# Altium PCB ZS-005.PcbDoc
Units mil, origin at the board's own origin, x right, y up, seen from the top; angles counter-clockwise.
Board outline 2371.88 x 911.23 mil, 2 copper layers (Top Layer, Bottom Layer); 11 components, 8 nets, 38 pads, 28 vias.
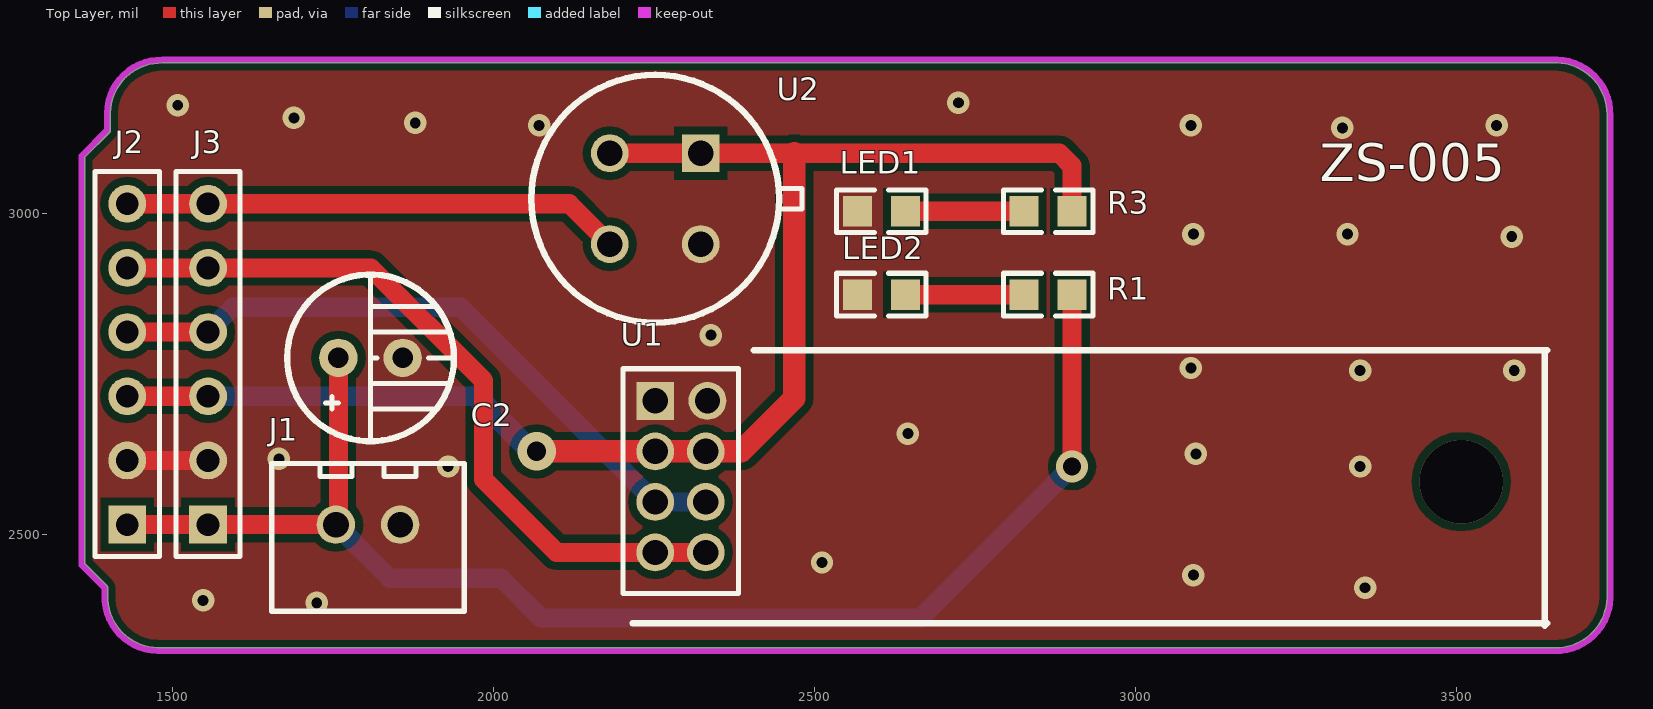
[diagram p0: Top Layer view]
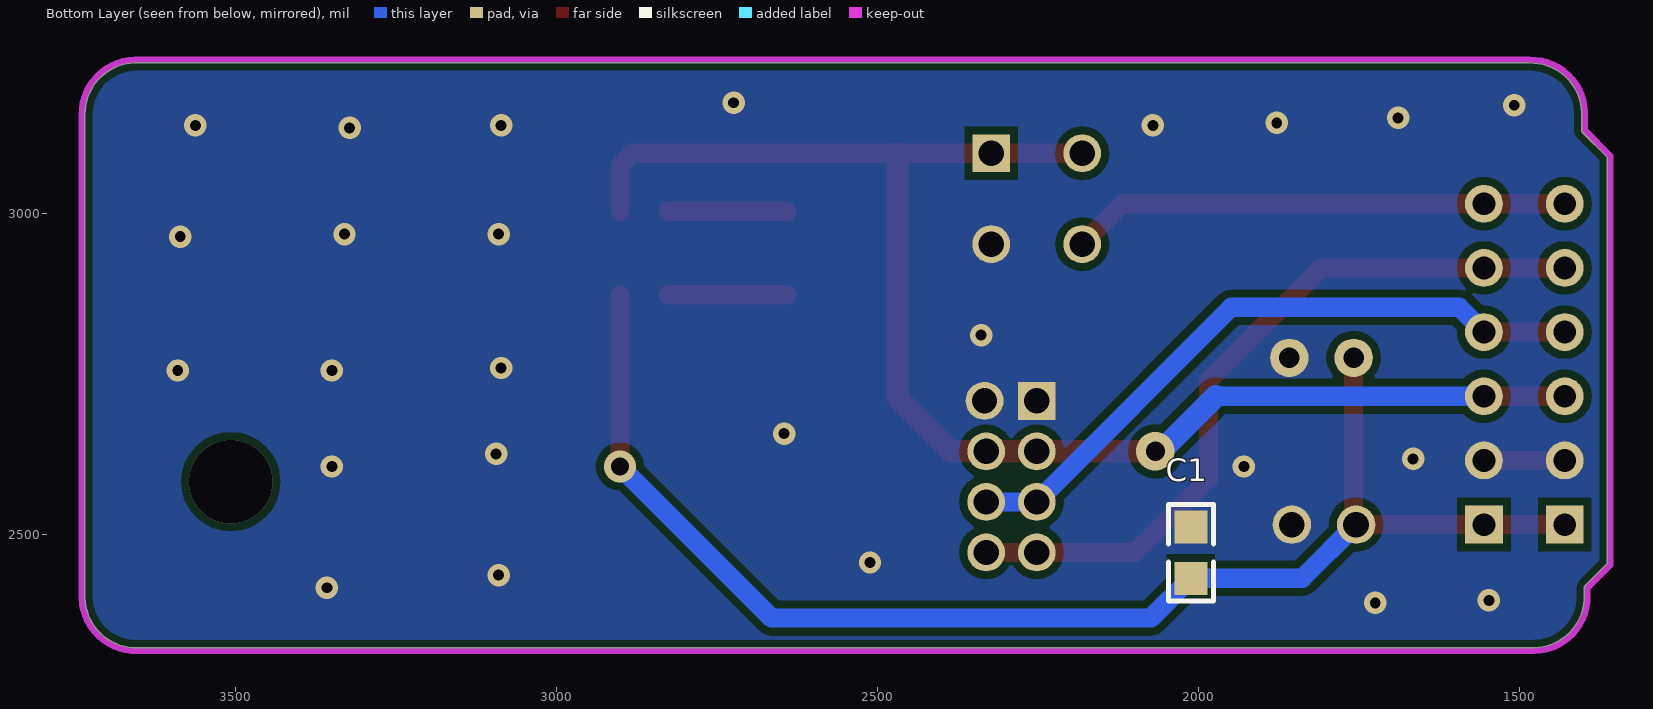
[diagram p1: Bottom Layer view, seen from below]

## Layer stack, top to bottom
Top Solder: solder mask 0.4, Solder Resist, Dk 3.5
Top Layer: signal copper 1.4
Dielectric 1: dielectric 12.6, FR-4, Dk 4.8
Bottom Layer: signal copper 1.4
Bottom Solder: solder mask 0.4, Solder Resist, Dk 3.5

## Board outline
1398.71,2405.36 ccw(c1393.7,2405.51) 1398.72,2405.51 1398.72,2417.32 ccw(c1393.7,2417.32) 1397.23,2420.89 1397.25,2420.87 1363.28,2454.83 1363.28,3088.47 1401.18,3126.38 1401.17,3126.36 ccw(c1397.64,3129.92) 1402.65,3129.92 1402.65,3157.42 cw(c1482.28,3155.51) 1484.1,3235.14 cw(c1482.28,3155.51) 1484.14,3235.14 1484.1,3235.14 ccw(c1484.25,3240.16) 1484.25,3235.14 1503.94,3235.14 ccw(c1503.94,3240.16) 1503.94,3235.14 3657.42,3235.14 ccw(c3655.51,3155.51) 3657.36,3235.14 3657.42,3235.14 cw(c3655.51,3155.51) 3735.17,3155.51 cw(c3655.51,3155.51) 3735.14,3153.69 cw(c3655.51,3155.51) 3735.14,3153.66 3735.14,3153.69 ccw(c3740.16,3153.54) 3735.14,3153.54 3735.14,3133.86 3735.14,3145.67 cw(c3740.16,3145.67) 3735.14,3145.71 3735.14,3145.67 3735.14,2401.63 ccw(c3655.51,2403.54) 3735.14,2401.69 3735.14,2401.63 cw(c3655.51,2403.54) 3653.69,2323.91 cw(c3655.51,2403.54) 3653.66,2323.91 3653.69,2323.91 ccw(c3653.54,2318.9) 3653.54,2323.91 1476.44,2323.91 cw(c1478.35,2403.54)

## Design rules (kind name [scope] priority, off if disabled: settings)
Clearance 铺铜12mil [InPolygon] p1: gap=12
Clearance 线间距7mil [All] p2: gap=7
DiffPairsRouting 差分线看具体阻抗要求 [All] p1: maxlimit=10 minlimit=10 mostfreqgap=10 toplayer_minwidth=15 toplayer_maxwidth=15 toplayer_prefwidth=15 bottomlayer_minwidth=15 bottomlayer_maxwidth=15 bottomlayer_prefwidth=15 maxuncoupledlength=500
PolygonConnect [All] p1: connectstyle=Direct reliefconductorwidth=10 reliefentries=4 polygonreliefangle="90 Angle" airgapwidth=10
RoutingVias 过孔大小 [All] p1: holewidth=20 width=40 viastyle="Through Hole" minholewidth=15 minwidth=30 maxholewidth=30 maxwidth=60
SolderMaskExpansion [All] p1: expansion=4
Width 线宽 [All] p1: maxlimit=50 minlimit=7 preferedwidth=10
29 further rules are at their usual default settings.

## Components (designator, comment, footprint, x,y, rotation, side; value= is the part's Value field where it differs from the comment)
C1 "104" 0805C 2011.81,2511.81 r270 bottom
C2 "220UF" "RB 2.5/6.3" 1858.27,2775.59 r180 top
J1 "HD1*2" XH2.54-2P 1854.33,2515.75 r270 top
J2 "Header 6" HDR1X6 1429.13,2515.75 r90 top
J3 "Header 6" HDR1X6 1555.12,2515.75 r90 top
LED1 "LED" 0805 2641.73,3003.94 r180 top (schematic designator R4)
LED2 "LED" 0805 2641.73,2874.02 r180 top (schematic designator R2)
R1 "10K" 0805 2901.57,2874.02 r180 top
R3 "10K" 0805 2901.57,3003.94 r180 top
U1 "HTG3515" HD2*4-2.0 2251.97,2708.66 r0 top
U2 "TGS2600" TGS2600 2322.83,3094.49 r270 top

## Footprints (in the part's own frame and the unit in brackets; to place one, negate y for a bottom-side part, rotate by r counter-clockwise, add the part's x,y. Pads: shape width x height; smd on the part's side, far side on the other; paste and mask are expansions set on the pad)
0805 [mm]
  rect 1.14x1.2 smd: 1(0,0) 2(1.9,0)
  silkscreen extent -0.82,-0.85 2.72,0.84
0805C [mm] "0805无极性电容"
  rect 1.3x1.3 smd: 1(0,0) 2(2.027,0)
  silkscreen extent -0.9,-0.89 2.92,0.89
HD2*4-2.0 [mm]
  rect 1.5x1.5 hole 1: 1(0,0)
  round 1.5 hole 1: 2(2.064,0) 3(0,-2) 4(2,-2) 5(0,-4) 6(2,-4) 7(0,-6) 8(2,-6)
  silkscreen extent -1.27,-7.62 3.3,1.27
HDR1X6 [mm] "Connector; Header; 6 Position"
  rect 1.5x1.5 hole 0.9: 1(0,0)
  round 1.5 hole 0.9: 2(2.54,0) 3(5.08,0) 4(7.62,0) 5(10.16,0) 6(12.7,0)
  silkscreen extent -1.27,-1.27 13.97,1.27
"RB 2.5/6.3" [mil]
  round 60 hole 32: 1(0,0) 2(100,0)
  silkscreen extent -80,-130 180,130
TGS2600 [mm]
  rect 1.5x1.5 hole 1: 1(0,0)
  round 1.5 hole 1: 2(0,-3.6) 3(3.6,-3.6) 4(3.6,0)
  silkscreen extent -3.1,-6.7 6.7,4
XH2.54-2P [mil]
  round 60 hole 40: 1(0,0) 2(0,-100)
  silkscreen extent -95,-200 135,100

## Part data
C1: library part CAP
C2: library part CAP-POL2
LED1 LED2 R1 R3: library part Res

## Via types
v1: diameter 35, hole 17, Top Layer to Bottom Layer, tented both sides, 25 vias
v2: diameter 60, hole 30, Top Layer to Bottom Layer, tented both sides, 1 vias
v3: diameter 129.92, hole 129.92, Top Layer to Bottom Layer, tented both sides, 1 vias
v4: diameter 50, hole 28, Top Layer to Bottom Layer, tented both sides, 1 vias

## Nets (pads, with @x,y where several pads share a name; then routed paths per layer and width w, separated by ;. In a path a pad name is that pad's centre, name@x,y a point inside that pad or via, vN(x,y) a via of type N, cw(c..) or ccw(c..) an arc to the next point about the centre after c; other vN are vias at no path point)
DEN: J2.6 J3.6 U2.3 | length 778.1
  Top Layer w30: J2.6 J3.6 2118.11,3015.75 U2.3
DGND: C1.1 C2.1 J1.1 J2.2 J3.2 LED1.2 LED2.2 U1.1 U1.2 U2.4 | length 126
  Top Layer w30: J2.2 J3.2
  other v1: 1724.41,2393.7 1547.24,2397.64 3358.27,2417.32 3090.55,2437.01 2511.81,2456.69 1929.13,2606.3 3350.39,2606.3 1665.35,2618.11 3094.49,2625.98 2645.67,2657.48 3350.39,2755.91 3590.55,2755.91 3086.61,2759.84 2338.58,2811.02 3586.61,2964.57 3090.55,2968.5 3330.71,2968.5 3322.83,3133.86 2070.87,3137.8 3086.61,3137.8 3562.99,3137.8 1877.95,3141.73 1688.98,3149.61 1507.87,3169.29 2724.41,3173.23
HUMI: J2.5 J3.5 U1.7 U1.8 | length 1175.1
  Top Layer w30: J2.5 J3.5 1808.66,2915.75 1984.25,2740.16 1984.25,2586.61 2098.43,2472.44 U1.7 U1.8
NetR1_2: LED2.1 R1.2 | length 185
  Top Layer w30: LED2.1 R1.2
NetR3_2: LED1.1 R3.2 | length 185
  Top Layer w30: LED1.1 R3.2
NTC: J2.4 J3.4 U1.5 U1.6 | length 1043.1
  Top Layer w30: J2.4 J3.4
  Bottom Layer w30: J3.4 1593.7,2854.33 1948.82,2854.33 U1.5 U1.6
VCC5: J2.3 J3.3 R3.1 U1.3 U1.4 U2.1 U2.2 | length 2290.5
  Top Layer w30: J2.3 J3.3 ; U2.2 U2.1 2468.5,3094.49 2881.89,3094.49 2901.57,3074.8 R3.1
  Top Layer w35: v2(2066.93,2629.92) U1.3 U1.4 2385.83,2629.92 2468.5,2712.6 2468.5,3094.49
  Bottom Layer w30: J3.3 1973.23,2715.75
  Bottom Layer w35: 1973.23,2715.75 2059.06,2629.92 v2(2066.93,2629.92)
VCC12: C1.2 C2.2 J1.2 J2.1 J3.1 R1.1 | length 2146.4
  Top Layer w30: J2.1 J3.1 J1.2 1758.27,2515.75 C2.2@1758.27,2759.84 ; v4(2901.57,2606.3) R1.1
  Bottom Layer w30: J1.2 1838.07,2432.01 C1.2 2073.74,2370.08 2665.35,2370.08 v4(2901.57,2606.3)
copper on no net:
  other v3: 3507.87,2582.68

## Polygon pours and split planes (outlines as drawn)
DGND on Top Layer "Keep-Out Layer-No Net" (solid, remove dead copper, pour order 1): 1398.71,2405.36 ccw(c1393.7,2405.51) 1398.72,2405.51 1398.72,2417.32 ccw(c1393.7,2417.32) 1397.23,2420.89 1397.25,2420.87 1363.28,2454.83 1363.28,3088.47 1401.18,3126.38 1401.17,3126.36 ccw(c1397.64,3129.92) 1402.65,3129.92 1402.65,3157.42 cw(c1482.28,3155.51) 1484.1,3235.14 cw(c1482.3,3155.54) 1484.14,3235.14 1484.1,3235.14 ccw(c1484.25,3240.16) 1484.25,3235.14 1503.94,3235.14 ccw(c1503.94,3240.16) 1503.94,3235.14 3657.42,3235.14 ccw(c3655.47,3155.46) 3657.36,3235.14 3657.42,3235.14 cw(c3655.51,3155.51) 3735.17,3155.51 cw(c3655.51,3155.51) 3735.14,3153.69 cw(c3655.54,3155.49) 3735.14,3153.66 3735.14,3153.69 ccw(c3740.16,3153.54) 3735.14,3153.54 3735.14,3133.86 3735.14,3145.67 cw(c3740.16,3145.67) 3735.14,3145.71 3735.14,3145.67 3735.14,2401.63 ccw(c3655.46,2403.58) 3735.14,2401.69 3735.14,2401.63 cw(c3655.51,2403.54) 3653.69,2323.91 cw(c3655.49,2403.52) 3653.66,2323.91 3653.69,2323.91 ccw(c3653.54,2318.9) 3653.54,2323.91 1476.44,2323.91 cw(c1478.35,2403.54)
DGND on Bottom Layer "AutoNaming" (solid, remove dead copper, pour order 0): 1398.71,2405.36 ccw(c1393.7,2405.51) 1398.72,2405.51 1398.72,2417.32 ccw(c1393.7,2417.32) 1397.23,2420.89 1397.25,2420.87 1363.28,2454.83 1363.28,3088.47 1401.18,3126.38 1401.17,3126.36 ccw(c1397.64,3129.92) 1402.65,3129.92 1402.65,3157.42 cw(c1482.28,3155.51) 1484.1,3235.14 cw(c1482.3,3155.54) 1484.14,3235.14 1484.1,3235.14 ccw(c1484.25,3240.16) 1484.25,3235.14 1503.94,3235.14 ccw(c1503.94,3240.16) 1503.94,3235.14 3657.42,3235.14 ccw(c3655.47,3155.46) 3657.36,3235.14 3657.42,3235.14 cw(c3655.51,3155.51) 3735.17,3155.51 cw(c3655.51,3155.51) 3735.14,3153.69 cw(c3655.54,3155.49) 3735.14,3153.66 3735.14,3153.69 ccw(c3740.16,3153.54) 3735.14,3153.54 3735.14,3133.86 3735.14,3145.67 cw(c3740.16,3145.67) 3735.14,3145.71 3735.14,3145.67 3735.14,2401.63 ccw(c3655.46,2403.58) 3735.14,2401.69 3735.14,2401.63 cw(c3655.51,2403.54) 3653.69,2323.91 cw(c3655.49,2403.52) 3653.66,2323.91 3653.69,2323.91 ccw(c3653.54,2318.9) 3653.54,2323.91 1476.44,2323.91 cw(c1478.35,2403.54)

## Keep-outs
Keep-Out Layer:
  lines w10: 3740.16,3133.86 3740.16,3153.54 ccw(c3655.51,3155.51) 3657.48,3240.16 1503.94,3240.16 1484.25,3240.16 ccw(c1482.28,3155.51) 1397.64,3157.48 1397.64,3129.92 1358.27,3090.55 1358.27,2452.76 1393.7,2417.32 1393.7,2405.51 ccw(c1478.35,2403.54) 1476.38,2318.9 3653.54,2318.9 ccw(c3655.51,2403.54) 3740.16,2401.57 3740.16,3145.67

## Silkscreen, mask and mechanical layers (free items; w line width, h text height)
Top Overlay:
  lines w10: 2216.54,2362.2 3641.73,2362.2 ; 2405.51,2787.4 3641.73,2787.4 ; 3637.8,2358.27 3637.8,2748.03 3637.8,2783.46
  text "ZS-005" at 3287.4,3031.5 h100
Mechanical 1:
  lines w10: 3740.16,3133.86 3740.16,3153.54 ccw(c3655.51,3155.51) 3657.48,3240.16 1503.94,3240.16 1484.25,3240.16 ccw(c1482.28,3155.51) 1397.64,3157.48 1397.64,3129.92 1358.27,3090.55 1358.27,2452.76 1393.7,2417.32 1393.7,2405.51 ccw(c1478.35,2403.54) 1476.38,2318.9 3653.54,2318.9 ccw(c3655.51,2403.54) 3740.16,2401.57 3740.16,3145.67